# Altium PCB PCB1.PcbDoc
Units mm, origin at the board's own origin, x right, y up, seen from the top; angles counter-clockwise.
Board outline 152.4 x 101.6 mm, 2 copper layers (Top Layer, Bottom Layer); 5 components, 4 nets, 10 pads, 0 vias.
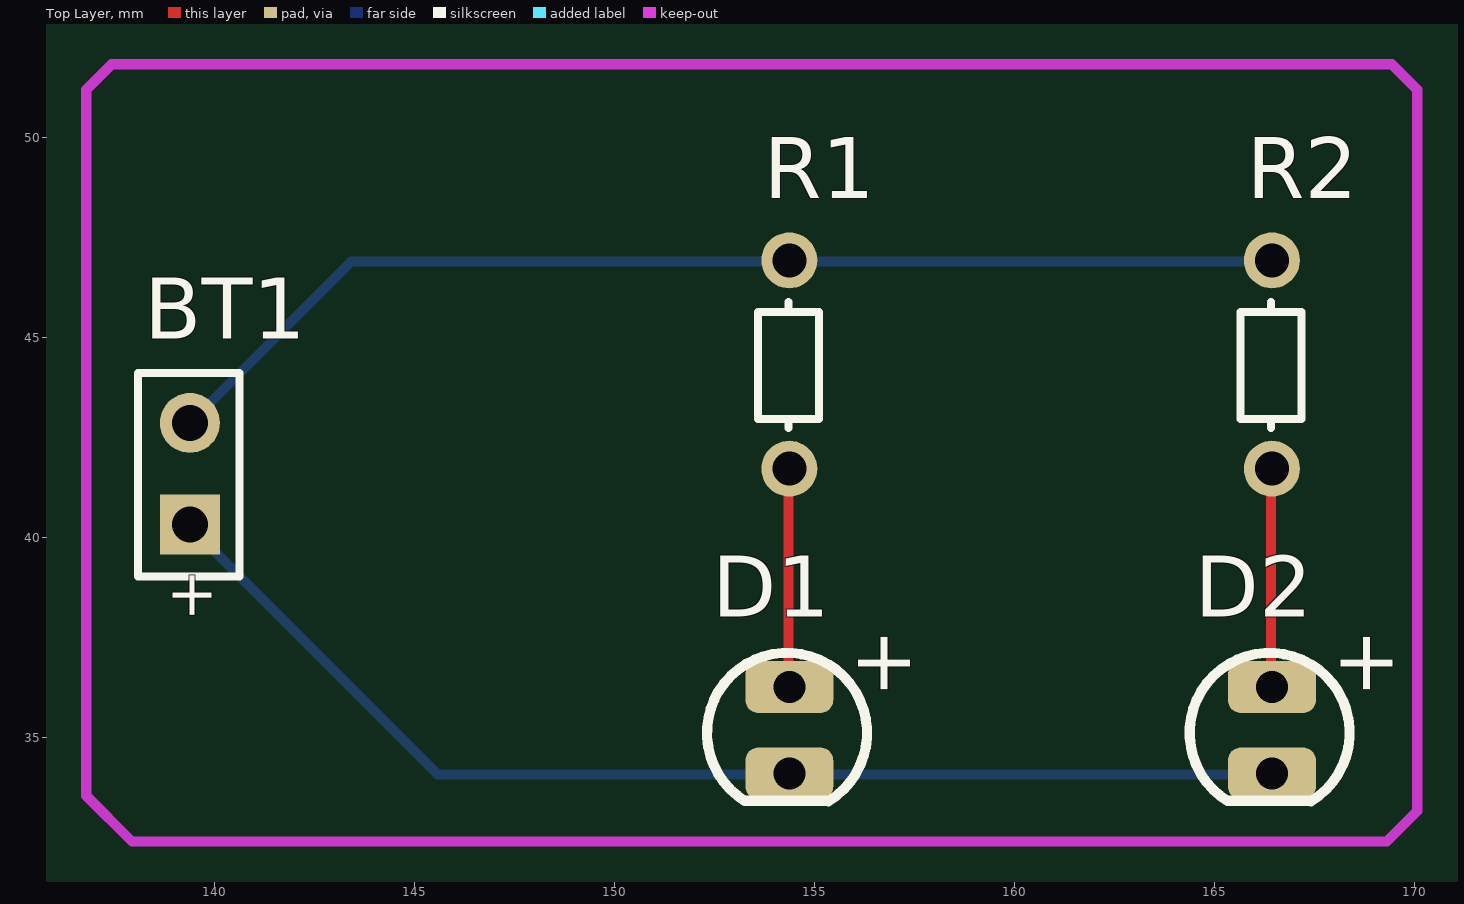
[diagram p0: Top Layer view]
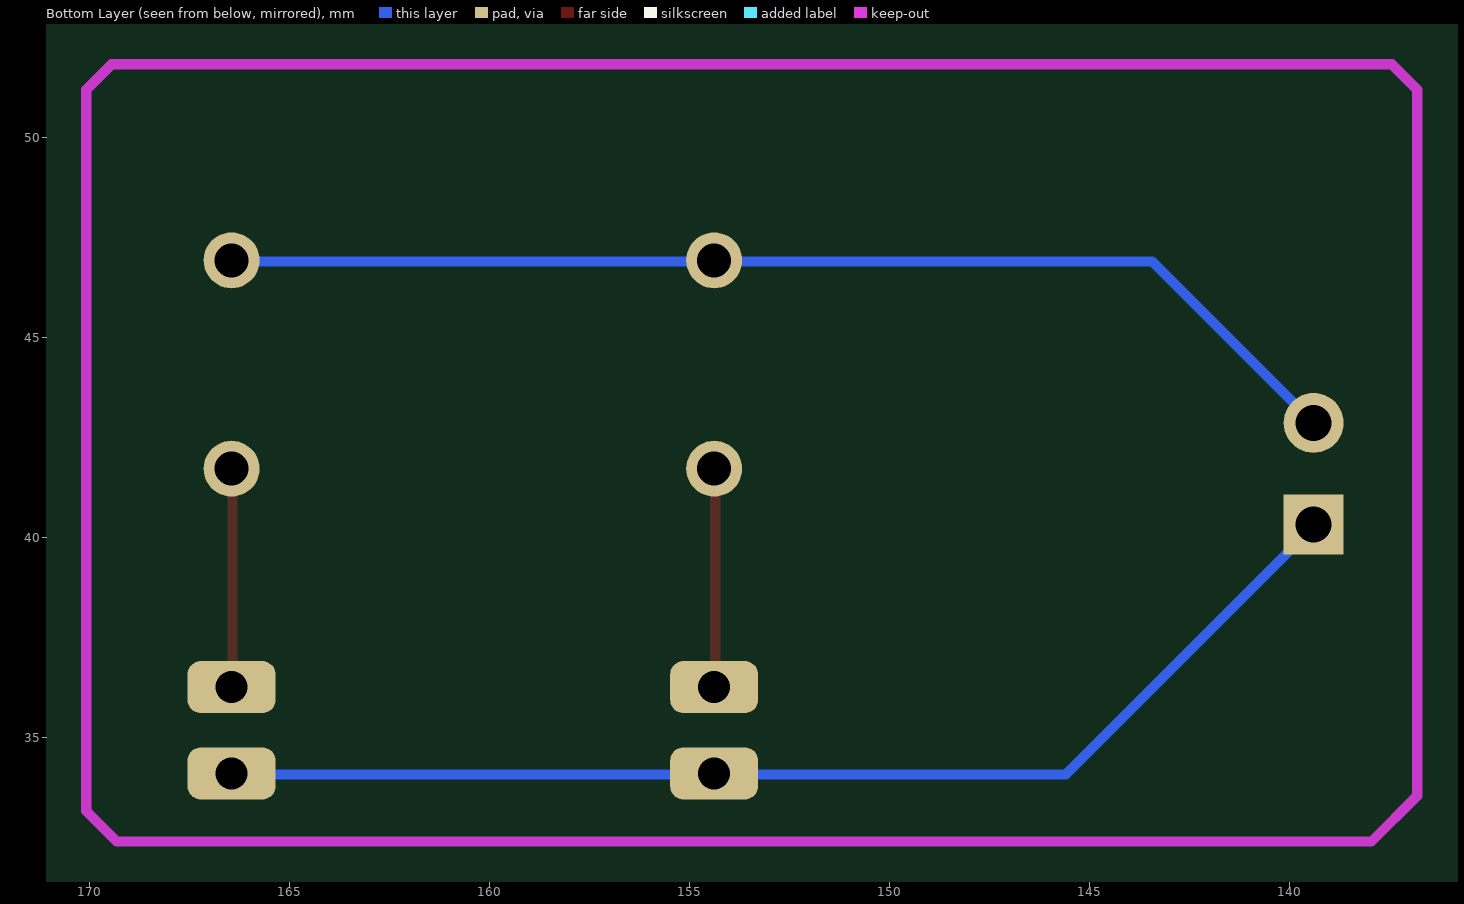
[diagram p1: Bottom Layer view, seen from below]

## Layer stack, top to bottom
Top Solder: solder mask 0.0102, Solder Resist, Dk 3.5
Top Layer: signal copper 0.0356
Dielectric 1: dielectric 0.32, FR-4, Dk 4.8
Bottom Layer: signal copper 0.0356
Bottom Solder: solder mask 0.0102, Solder Resist, Dk 3.5

## Board outline
25.4,25.4 177.8,25.4 177.8,127 25.4,127

## Design rules (kind name [scope] priority, off if disabled: settings)
Clearance [All] p1: gap=0.254
PolygonConnect [All] p1: connectstyle=Relief reliefconductorwidth=0.254 reliefentries=4 polygonreliefangle="90 Angle" airgapwidth=0.254
RoutingVias [All] p1: holewidth=0.711 width=1.27 viastyle="Through Hole" minholewidth=0.711 minwidth=1.27 maxholewidth=0.711 maxwidth=1.27
SolderMaskExpansion [All] p1: expansion=0.102
Width [All] p1: maxlimit=0.254 minlimit=0.254 preferedwidth=0.254
30 further rules are at their usual default settings.

## Components (designator, comment, footprint, x,y, rotation, side; value= is the part's Value field where it differs from the comment)
BT1 "Battery" BAT-2 139.344,41.554 r90 top
D1 "LED 3mm" LED-3mm 154.203,35.204 r0 top
D2 "LED 3mm" LED-3mm 166.268,35.204 r0 top
R1 "Resistor vertical" Res50 154.33,45.491 r90 top
R2 "Resistor vertical" Res50 166.395,45.491 r90 top

## Footprints (in the part's own frame and the unit in brackets; to place one, negate y for a bottom-side part, rotate by r counter-clockwise, add the part's x,y. Pads: shape width x height; smd on the part's side, far side on the other; paste and mask are expansions set on the pad)
BAT-2 [mm] "Battery; 2 Leads"
  rect 1.5x1.5 hole 0.9: 1(-1.219,-0.051)
  round 1.5 hole 0.9: 2(1.321,-0.051)
  silkscreen extent -2.51,-1.3 2.57,1.24
LED-3mm [mm] "LED; 2 Leads"
  rrect50% 2.2x1.3 hole 0.8: 1(0.178,1.067) 2(0.178,-1.092)
  silkscreen extent -1.88,-1.79 2.12,1.92
Res50 [mm] "50mm Pin Spacing"
  round 1.4 hole 0.85: 1(-3.759,-0.051) 2(1.448,-0.051)
  silkscreen extent -2.74,-0.79 0.41,0.74

## Part data
BT1: "Multicell Battery"
D1 D2: "Typical LED"
R1 R2: "Resistor 0.5"

## Nets (pads, with @x,y where several pads share a name; then routed paths per layer and width w, separated by ;. In a path a pad name is that pad's centre, name@x,y a point inside that pad or via, vN(x,y) a via of type N, cw(c..) or ccw(c..) an arc to the next point about the centre after c; other vN are vias at no path point)
NetBT1_1: BT1.1 D1.2 D2.2 | length 29.6
  Bottom Layer w0.254: BT1.1@139.37,40.31 145.593,34.087 D2.2@166.421,34.087
NetBT1_2: BT1.2 R1.2 R2.2 | length 28.7
  Bottom Layer w0.254: BT1.2@139.37,42.85 BT1.2 143.434,46.914 R2.2@166.421,46.914
NetD1_1: D1.1 R1.1 | length 5.5
  Top Layer w0.254: D1.1@154.356,36.246 R1.1@154.356,41.707
NetD2_1: D2.1 R2.1 | length 5.5
  Top Layer w0.254: D2.1@166.421,36.246 R2.1@166.421,41.707

## Keep-outs
Keep-Out Layer:
  lines w0.254: 136.804,33.553 137.947,32.41 169.316,32.41 170.078,33.172 170.078,51.206 169.443,51.841 137.439,51.841 136.804,51.206 136.804,33.553

## Text inside footprints (layer, text, board x,y; h text height)
BT1: Top Overlay "+" at 139.947,37.91 h1.15 r90
D1: Top Overlay "+" at 157.404,35.992 h1.52 r90
D2: Top Overlay "+" at 169.469,35.992 h1.52 r90